# Altium PCB PCB_Thu.PcbDoc (part 2 of 2)
Units mm, origin at the board's own origin, x right, y up, seen from the top; angles counter-clockwise.
Board outline 107.94 x 47.36 mm, 2 copper layers (Top Layer, Bottom Layer); 234 components, 35 nets, 885 pads, 0 vias.
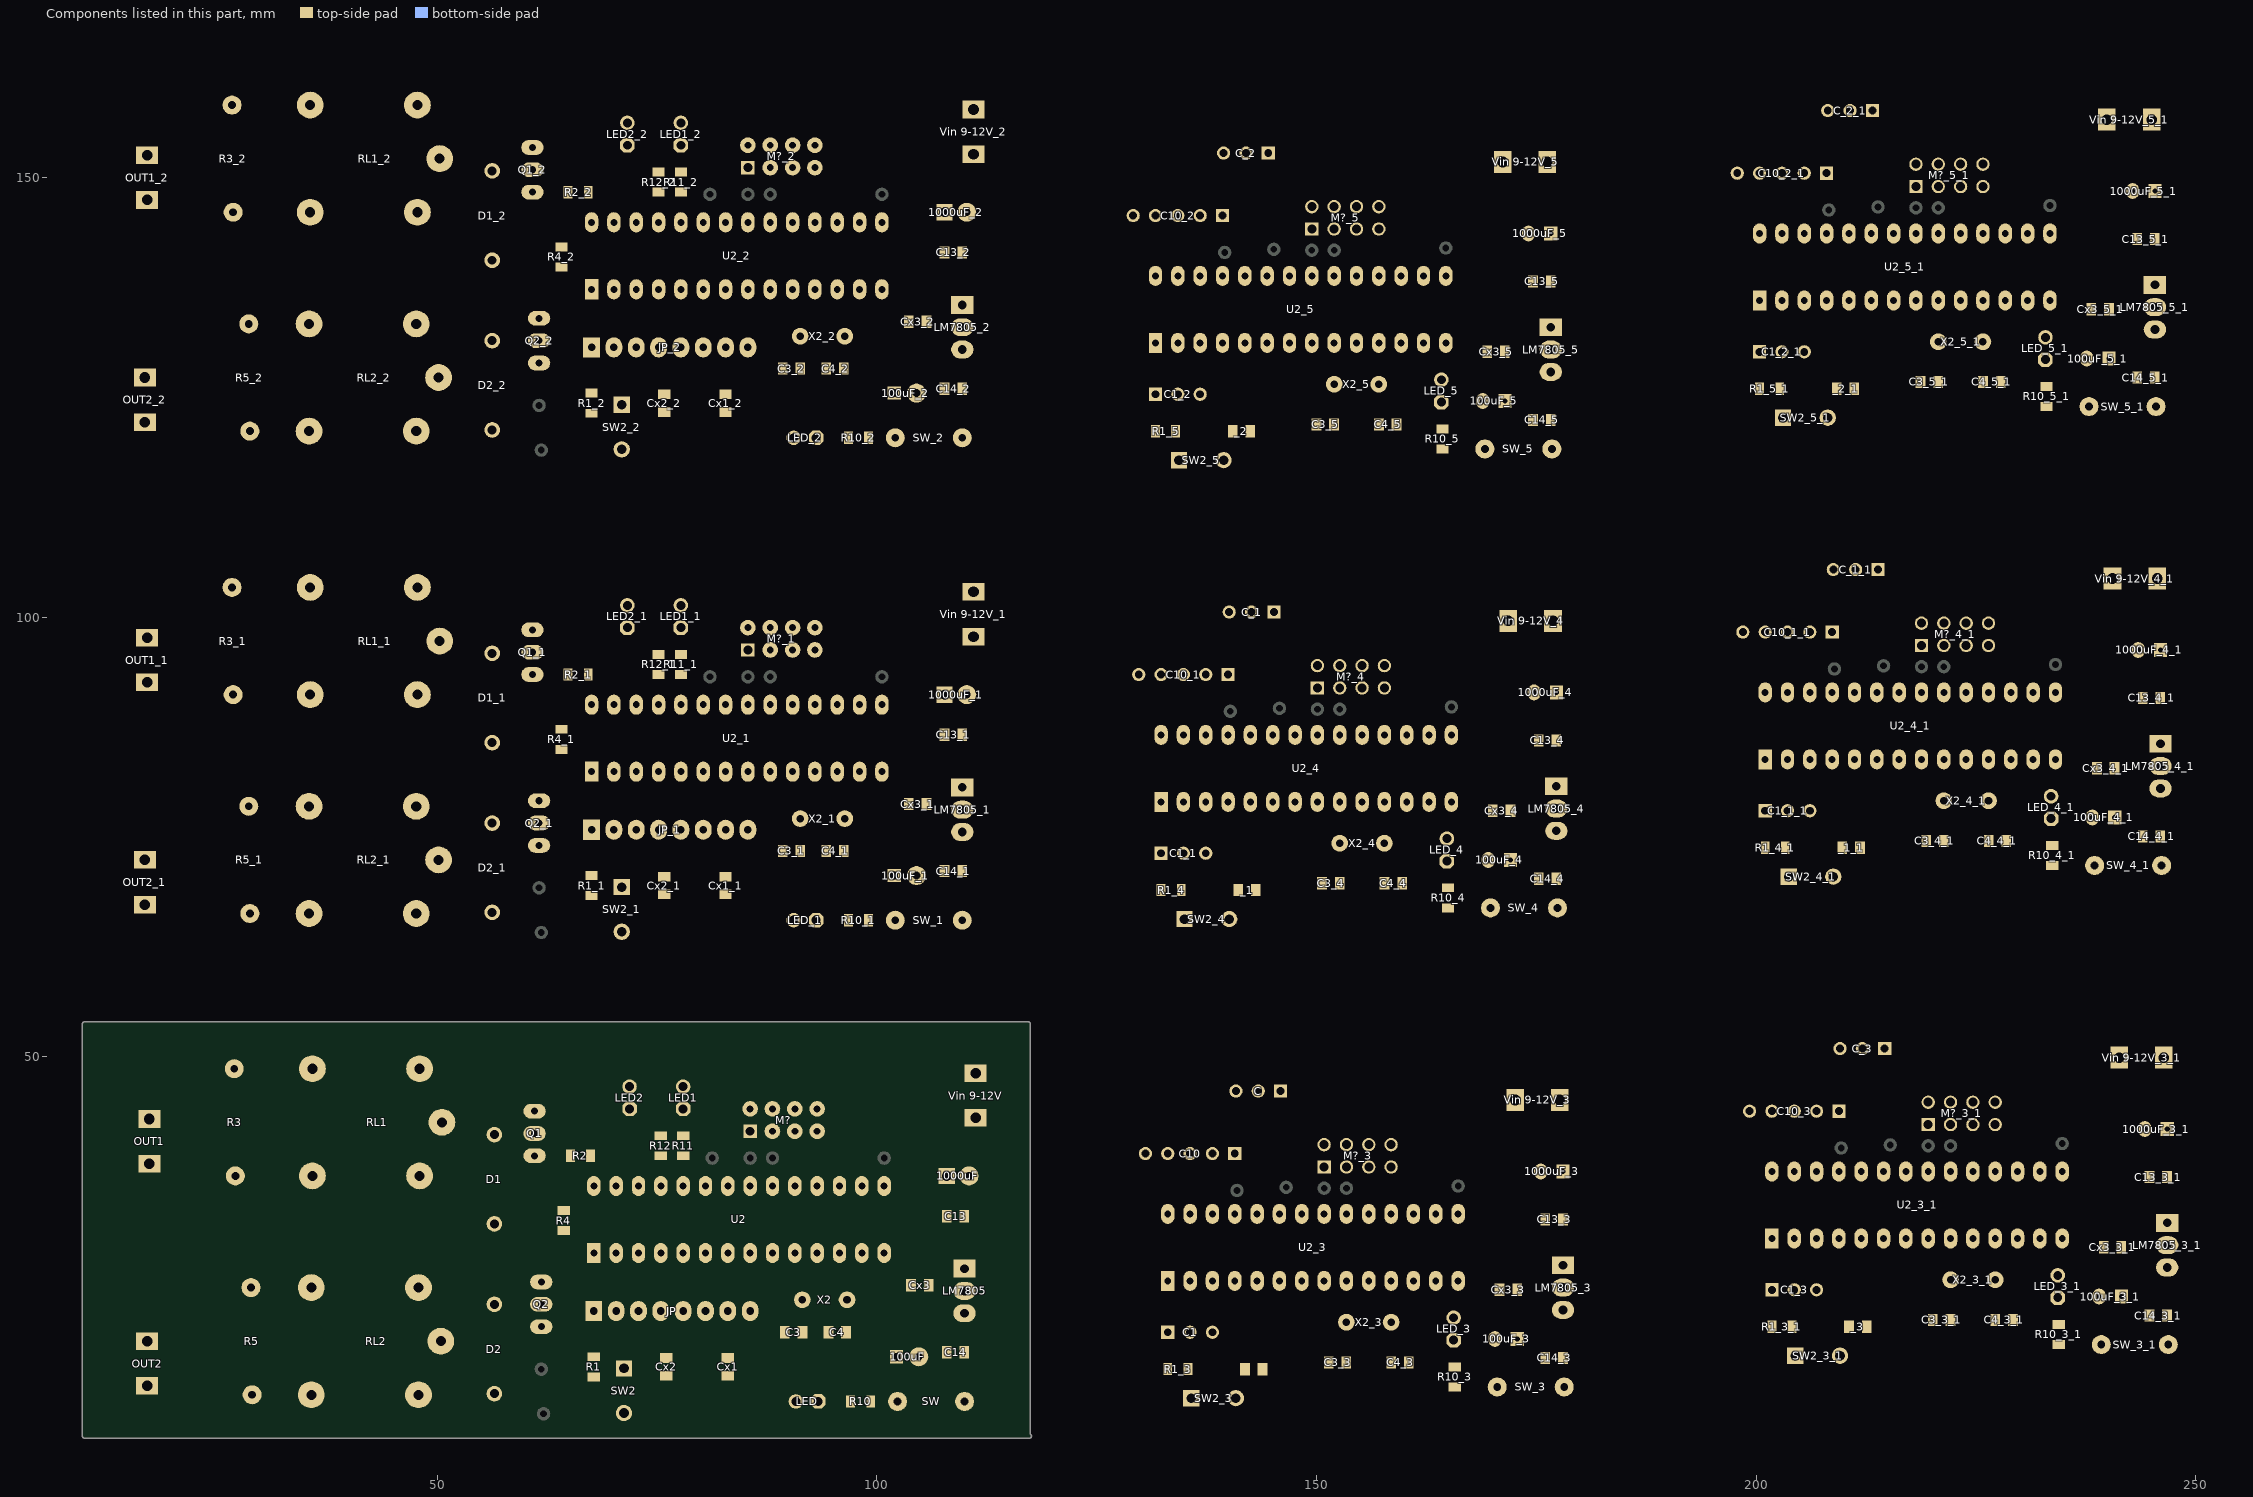
[diagram p2: the components of this part, seen from the top]

## Nets (pads, with @x,y where several pads share a name; then routed paths per layer and width w, separated by ;. In a path a pad name is that pad's centre, name@x,y a point inside that pad or via, vN(x,y) a via of type N, cw(c..) or ccw(c..) an arc to the next point about the centre after c; other vN are vias at no path point) (continued)
pads on no net: 100uF_1.1 100uF_1.2 100uF_2.1 100uF_2.2 100uF_3.1 100uF_3.2 100uF_3_1.1 100uF_3_1.2 100uF_4.1 100uF_4.2 100uF_4_1.1 100uF_4_1.2 100uF_5.1 100uF_5.2 100uF_5_1.1 100uF_5_1.2 1000uF_1.1 1000uF_1.2 1000uF_2.1 1000uF_2.2 1000uF_3.1 1000uF_3.2 1000uF_3_1.1 1000uF_3_1.2 1000uF_4.1 1000uF_4.2 1000uF_4_1.1 1000uF_4_1.2 1000uF_5.1 1000uF_5.2 1000uF_5_1.1 1000uF_5_1.2 "Vin 9-12V_1.1" "Vin 9-12V_1.2" "Vin 9-12V_2.1" "Vin 9-12V_2.2" "Vin 9-12V_3.1" "Vin 9-12V_3.2" "Vin 9-12V_3_1.1" "Vin 9-12V_3_1.2" "Vin 9-12V_4.1" "Vin 9-12V_4.2" "Vin 9-12V_4_1.1" "Vin 9-12V_4_1.2" "Vin 9-12V_5.1" "Vin 9-12V_5.2" "Vin 9-12V_5_1.1" "Vin 9-12V_5_1.2" ?.1 ?.2 _1.1 _1.2 _1_1.1 _1_1.2 _2.1 _2.2 _2_1.1 _2_1.2 _3.1 _3.2 C1.1 C1.2 C1.3 C1_1.1 C1_1.2 C1_1.3 C1_1_1.1 C1_1_1.2 C1_1_1.3 C1_2.1 C1_2.2 C1_2.3 C1_2_1.1 C1_2_1.2 C1_2_1.3 C1_3.1 C1_3.2 C1_3.3 C3_1.1 C3_1.2 C3_2.1 C3_2.2 C3_3.1 C3_3.2 C3_3_1.1 C3_3_1.2 C3_4.1 C3_4.2 C3_4_1.1 C3_4_1.2 C3_5.1 C3_5.2 C3_5_1.1 C3_5_1.2 C4_1.1 C4_1.2 C4_2.1 C4_2.2 C4_3.1 C4_3.2 C4_3_1.1 C4_3_1.2 C4_4.1 C4_4.2 C4_4_1.1 C4_4_1.2 C4_5.1 C4_5.2 C4_5_1.1 C4_5_1.2 C10.1 C10.2 C10.3 C10.4 C10.5 C10_1.1 C10_1.2 C10_1.3 C10_1.4 C10_1.5 C10_1_1.1 C10_1_1.2 C10_1_1.3 C10_1_1.4 C10_1_1.5 C10_2.1 C10_2.2 C10_2.3 C10_2.4 C10_2.5 C10_2_1.1 C10_2_1.2 C10_2_1.3 C10_2_1.4 C10_2_1.5 C10_3.1 C10_3.2 C10_3.3 C10_3.4 C10_3.5 C13_1.1 C13_1.2 C13_2.1 C13_2.2 C13_3.1 C13_3.2 C13_3_1.1 C13_3_1.2 C13_4.1 C13_4.2 C13_4_1.1 C13_4_1.2 C13_5.1 C13_5.2 C13_5_1.1 C13_5_1.2 C14_1.1 C14_1.2 C14_2.1 C14_2.2 C14_3.1 C14_3.2 C14_3_1.1 C14_3_1.2 C14_4.1 C14_4.2 C14_4_1.1 C14_4_1.2 C14_5.1 C14_5.2 C14_5_1.1 C14_5_1.2 C.1 C.2 C.3 C_1.1 C_1.2 C_1.3 C_1_1.1 C_1_1.2 C_1_1.3 C_2.1 C_2.2 C_2.3 C_2_1.1 C_2_1.2 C_2_1.3 C_3.1 C_3.2 C_3.3 Cx1_1.1 Cx1_1.2 Cx1_2.1 Cx1_2.2 Cx2_1.1 Cx2_1.2 Cx2_2.1 Cx2_2.2 Cx3_1.1 Cx3_1.2 Cx3_2.1 Cx3_2.2 Cx3_3.1 Cx3_3.2 Cx3_3_1.1 Cx3_3_1.2 Cx3_4.1 Cx3_4.2 Cx3_4_1.1 Cx3_4_1.2 Cx3_5.1 Cx3_5.2 Cx3_5_1.1 Cx3_5_1.2 D1_1.1 D1_1.2 D1_2.1 D1_2.2 D2_1.1 D2_1.2 D2_2.1 D2_2.2 JP_1.1 JP_1.2 JP_1.3 JP_1.4 JP_1.5 JP_1.6 JP_1.7 JP_1.8 JP_2.1 JP_2.2 JP_2.3 JP_2.4 JP_2.5 JP_2.6 JP_2.7 JP_2.8 LED1_1.1 LED1_1.2 LED1_2.1 LED1_2.2 LED2_1.1 LED2_1.2 LED2_2.1 LED2_2.2 LED_1.1 LED_1.2 LED_2.1 LED_2.2 LED_3.1 LED_3.2 LED_3_1.1 LED_3_1.2 LED_4.1 LED_4.2 LED_4_1.1 LED_4_1.2 LED_5.1 LED_5.2 LED_5_1.1 LED_5_1.2 LM7805_1.1 LM7805_1.2 LM7805_1.3 LM7805_2.1 LM7805_2.2 LM7805_2.3 LM7805_3.1 LM7805_3.2 LM7805_3.3 LM7805_3_1.1 LM7805_3_1.2 LM7805_3_1.3 LM7805_4.1 LM7805_4.2 LM7805_4.3 LM7805_4_1.1 LM7805_4_1.2 LM7805_4_1.3 LM7805_5.1 LM7805_5.2 LM7805_5.3 LM7805_5_1.1 LM7805_5_1.2 LM7805_5_1.3 M?_1.1 M?_1.2 M?_1.3 M?_1.4 M?_1.5 M?_1.6 M?_1.7 M?_1.8 M?_2.1 M?_2.2 M?_2.3 M?_2.4 M?_2.5 M?_2.6 M?_2.7 M?_2.8 M?_3.1 M?_3.2 M?_3.3 M?_3.4 M?_3.5 M?_3.6 M?_3.7 M?_3.8 M?_3_1.1 M?_3_1.2 M?_3_1.3 M?_3_1.4 M?_3_1.5 M?_3_1.6 M?_3_1.7 M?_3_1.8 M?_4.1 M?_4.2 M?_4.3 M?_4.4 M?_4.5 M?_4.6 M?_4.7 M?_4.8 M?_4_1.1 M?_4_1.2 M?_4_1.3 M?_4_1.4 M?_4_1.5 M?_4_1.6 M?_4_1.7 M?_4_1.8 M?_5.1 M?_5.2 M?_5.3 M?_5.4 M?_5.5 M?_5.6 M?_5.7 M?_5.8 M?_5_1.1 M?_5_1.2 M?_5_1.3 M?_5_1.4 M?_5_1.5 M?_5_1.6 M?_5_1.7 M?_5_1.8 OUT1_1.1 OUT1_1.2 OUT1_2.1 OUT1_2.2 OUT2_1.1 OUT2_1.2 OUT2_2.1 OUT2_2.2 Q1_1.1 Q1_1.2 Q1_1.3 Q1_2.1 Q1_2.2 Q1_2.3 Q2_1.1 Q2_1.2 Q2_1.3 Q2_2.1 Q2_2.2 Q2_2.3 R1_1.1 R1_1.2 R1_2.1 R1_2.2 R1_3.1 R1_3.2 R1_3_1.1 R1_3_1.2 R1_4.1 R1_4.2 R1_4_1.1 R1_4_1.2 R1_5.1 R1_5.2 R1_5_1.1 R1_5_1.2 R2_1.1 R2_1.2 R2_2.1 R2_2.2 R3_1.1 R3_1.2 R3_2.1 R3_2.2 R4_1.1 R4_1.2 R4_2.1 R4_2.2 R5_1.1 R5_1.2 R5_2.1 R5_2.2 R10_1.1 R10_1.2 R10_2.1 R10_2.2 R10_3.1 R10_3.2 R10_3_1.1 R10_3_1.2 R10_4.1 R10_4.2 R10_4_1.1 R10_4_1.2 R10_5.1 R10_5.2 R10_5_1.1 R10_5_1.2 R11_1.1 R11_1.2 R11_2.1 R11_2.2 R12_1.1 R12_1.2 R12_2.1 R12_2.2 RL1.2 RL1_1.1 RL1_1.2 RL1_1.3 RL1_1.4 RL1_1.5 RL1_2.1 RL1_2.2 RL1_2.3 RL1_2.4 RL1_2.5 RL2.2 RL2_1.1 RL2_1.2 RL2_1.3 RL2_1.4 RL2_1.5 RL2_2.1 RL2_2.2 RL2_2.3 RL2_2.4 RL2_2.5 SW2_1.1 SW2_1.2 SW2_2.1 SW2_2.2 SW2_3.1 SW2_3.2 SW2_3_1.1 SW2_3_1.2 SW2_4.1 SW2_4.2 SW2_4_1.1 SW2_4_1.2 SW2_5.1 SW2_5.2 SW2_5_1.1 SW2_5_1.2 SW_1.1 SW_1.2 SW_2.1 SW_2.2 SW_3.1 SW_3.2 SW_3_1.1 SW_3_1.2 SW_4.1 SW_4.2 SW_4_1.1 SW_4_1.2 SW_5.1 SW_5.2 SW_5_1.1 SW_5_1.2 U2.11 U2.12 U2.13 U2.14 U2.23 U2.26 U2_1.1 U2_1.2 U2_1.3 U2_1.4 U2_1.5 U2_1.6 U2_1.7 U2_1.8 U2_1.9 U2_1.10 U2_1.11 U2_1.12 U2_1.13 U2_1.14 U2_1.15 U2_1.16 U2_1.17 U2_1.18 U2_1.19 U2_1.20 U2_1.21 U2_1.22 U2_1.23 U2_1.24 U2_1.25 U2_1.26 U2_1.27 U2_1.28 U2_2.1 U2_2.2 U2_2.3 U2_2.4 U2_2.5 U2_2.6 U2_2.7 U2_2.8 U2_2.9 U2_2.10 U2_2.11 U2_2.12 U2_2.13 U2_2.14 U2_2.15 U2_2.16 U2_2.17 U2_2.18 U2_2.19 U2_2.20 U2_2.21 U2_2.22 U2_2.23 U2_2.24 U2_2.25 U2_2.26 U2_2.27 U2_2.28 U2_3.1 U2_3.2 U2_3.3 U2_3.4 U2_3.5 U2_3.6 U2_3.7 U2_3.8 U2_3.9 U2_3.10 U2_3.11 U2_3.12 U2_3.13 U2_3.14 U2_3.15 U2_3.16 U2_3.17 U2_3.18 U2_3.19 U2_3.20 U2_3.21 U2_3.22 U2_3.23 U2_3.24 U2_3.25 U2_3.26 U2_3.27 U2_3.28 U2_3_1.1 U2_3_1.2 U2_3_1.3 U2_3_1.4 U2_3_1.5 U2_3_1.6 U2_3_1.7 U2_3_1.8 U2_3_1.9 U2_3_1.10 U2_3_1.11 U2_3_1.12 U2_3_1.13 U2_3_1.14 U2_3_1.15 U2_3_1.16 U2_3_1.17 U2_3_1.18 U2_3_1.19 U2_3_1.20 U2_3_1.21 U2_3_1.22 U2_3_1.23 U2_3_1.24 U2_3_1.25 U2_3_1.26 U2_3_1.27 U2_3_1.28 U2_4.1 U2_4.2 U2_4.3 U2_4.4 U2_4.5 U2_4.6 U2_4.7 U2_4.8 U2_4.9 U2_4.10 U2_4.11 U2_4.12 U2_4.13 U2_4.14 U2_4.15 U2_4.16 U2_4.17 U2_4.18 U2_4.19 U2_4.20 U2_4.21 U2_4.22 U2_4.23 U2_4.24 U2_4.25 U2_4.26 U2_4.27 U2_4.28 U2_4_1.1 U2_4_1.2 U2_4_1.3 U2_4_1.4 U2_4_1.5 U2_4_1.6 U2_4_1.7 U2_4_1.8 U2_4_1.9 U2_4_1.10 U2_4_1.11 U2_4_1.12 U2_4_1.13 U2_4_1.14 U2_4_1.15 U2_4_1.16 U2_4_1.17 U2_4_1.18 U2_4_1.19 U2_4_1.20 U2_4_1.21 U2_4_1.22 U2_4_1.23 U2_4_1.24 U2_4_1.25 U2_4_1.26 U2_4_1.27 U2_4_1.28 U2_5.1 U2_5.2 U2_5.3 U2_5.4 U2_5.5 U2_5.6 U2_5.7 U2_5.8 U2_5.9 U2_5.10 U2_5.11 U2_5.12 U2_5.13 U2_5.14 U2_5.15 U2_5.16 U2_5.17 U2_5.18 U2_5.19 U2_5.20 U2_5.21 U2_5.22 U2_5.23 U2_5.24 U2_5.25 U2_5.26 U2_5.27 U2_5.28 U2_5_1.1 U2_5_1.2 U2_5_1.3 U2_5_1.4 U2_5_1.5 U2_5_1.6 U2_5_1.7 U2_5_1.8 U2_5_1.9 U2_5_1.10 U2_5_1.11 U2_5_1.12 U2_5_1.13 U2_5_1.14 U2_5_1.15 U2_5_1.16 U2_5_1.17 U2_5_1.18 U2_5_1.19 U2_5_1.20 U2_5_1.21 U2_5_1.22 U2_5_1.23 U2_5_1.24 U2_5_1.25 U2_5_1.26 U2_5_1.27 U2_5_1.28 X2_1.1 X2_1.2 X2_2.1 X2_2.2 X2_3.1 X2_3.2 X2_3_1.1 X2_3_1.2 X2_4.1 X2_4.2 X2_4_1.1 X2_4_1.2 X2_5.1 X2_5.2 X2_5_1.1 X2_5_1.2
copper on no net: | length 5806.6
  Top Layer w0.5: 16.637,92.964 17.018,92.583 ; 16.637,147.828 17.018,147.447 ; 60.833,98.552 68.834,98.552 71.628,101.346 77.724,101.346 81.026,98.044 81.026,93.218 81.026,91.821 82.804,90.043 ; 60.833,153.416 68.834,153.416 71.628,156.21 77.724,156.21 81.026,152.908 81.026,148.082 81.026,146.685 82.804,144.907 ; 61.595,69.215 61.595,74.041 ; 61.595,124.079 61.595,128.905 ; 61.849,64.135 70.912,64.135 ; 61.849,118.999 70.912,118.999 ; 85.344,75.819 85.344,82.423 ; 85.344,93.218 85.344,96.266 ; 85.344,130.683 85.344,137.287 ; 85.344,148.082 85.344,151.13 ; 90.424,98.806 90.424,99.06 91.809,100.445 94.373,100.445 95.504,99.314 95.504,90.043 ; 90.424,153.67 90.424,153.924 91.809,155.309 94.373,155.309 95.504,154.178 95.504,144.907 ; 107.696,70.231 107.708,70.243 107.708,77.331 108.954,77.331 109.728,78.105 112.776,78.105 114.427,79.756 114.427,83.185 111.506,86.106 111.506,89.916 110.236,91.186 112.998,93.948 112.998,99.101 110.998,101.101 110.998,102.87 111.379,103.251 ; 107.696,125.095 107.708,125.107 107.708,132.195 108.954,132.195 109.728,132.969 112.776,132.969 114.427,134.62 114.427,138.049 111.506,140.97 111.506,144.78 110.236,146.05 112.998,148.812 112.998,153.965 110.998,155.965 110.998,157.734 111.379,158.115 ; 116.967,61.595 116.967,108.458 9.652,108.458 9.652,61.595 117.094,61.595 ; 116.967,61.976 116.967,108.204 ; 116.967,116.459 116.967,163.322 9.652,163.322 9.652,116.459 117.094,116.459 ; 116.967,116.84 116.967,163.068 ; 117.221,6.858 117.221,53.721 9.906,53.721 9.906,6.858 117.348,6.858 ; 117.221,7.239 117.221,53.467 ; 125.857,115.57 125.857,157.353 181.483,157.353 181.483,115.57 125.857,115.57 ; 126.492,63.373 126.492,105.156 182.118,105.156 182.118,63.373 126.492,63.373 ; 127.254,8.89 127.254,50.673 182.88,50.673 182.88,8.89 127.254,8.89 ; 194.564,120.396 250.19,120.396 250.19,162.179 194.564,162.179 194.564,120.396 ; 195.199,68.199 250.825,68.199 250.825,109.982 195.199,109.982 195.199,68.199 ; 195.961,13.716 251.587,13.716 251.587,55.499 195.961,55.499 195.961,13.716
  Top Layer w0.6: 28.321,66.294 28.702,66.294 ; 28.321,121.158 28.702,121.158 ; 47.498,66.294 47.625,66.294 56.134,66.294 ; 47.498,121.158 47.625,121.158 56.134,121.158 ; 47.625,78.486 49.53,76.581 56.261,76.581 62.103,76.581 62.357,76.327 ; 47.625,133.35 49.53,131.445 56.261,131.445 62.103,131.445 62.357,131.191 ; 47.752,103.378 48.768,103.378 56.261,95.885 ; 47.752,158.242 48.768,158.242 56.261,150.749 ; 56.261,85.725 53.213,85.725 47.752,91.186 44.069,87.503 44.069,77.089 46.228,74.93 53.086,74.93 56.261,71.755 56.261,66.421 67.564,66.421 ; 56.261,140.589 53.213,140.589 47.752,146.05 44.069,142.367 44.069,131.953 46.228,129.794 53.086,129.794 56.261,126.619 56.261,121.285 67.564,121.285 ; 56.388,96.012 60.833,96.012 ; 56.388,150.876 60.833,150.876 ; 60.325,93.472 64.897,93.472 ; 60.325,148.336 64.897,148.336 ; 61.595,79.121 61.595,80.518 ; 61.595,133.985 61.595,135.382 ; 61.722,80.645 64.135,83.058 64.135,84.963 ; 61.722,135.509 64.135,137.922 64.135,139.827 ; 64.135,87.249 66.929,90.043 67.564,90.043 ; 64.135,142.113 66.929,144.907 67.564,144.907 ; 67.183,93.472 70.104,90.551 70.104,90.043 ; 67.183,148.336 70.104,145.415 70.104,144.907 ; 67.564,68.326 67.564,66.421 ; 67.564,82.423 67.564,75.819 67.564,70.612 67.608,70.612 68.923,69.296 70.993,69.296 ; 67.564,123.19 67.564,121.285 ; 67.564,137.287 67.564,130.683 67.564,125.476 67.608,125.476 68.923,124.16 70.993,124.16 ; 70.104,75.819 70.104,82.423 ; 70.104,130.683 70.104,137.287 ; 71.628,98.806 74.676,95.758 75.184,95.758 ; 71.628,153.67 74.676,150.622 75.184,150.622 ; 72.644,75.819 72.644,82.423 ; 72.644,130.683 72.644,137.287 ; 75.184,75.819 75.184,82.423 ; 75.184,90.043 75.184,93.472 ; 75.184,130.683 75.184,137.287 ; 75.184,144.907 75.184,148.336 ; 77.724,75.819 77.724,82.423 ; 77.724,90.043 77.724,93.472 ; 77.724,95.758 77.724,98.806 ; 77.724,130.683 77.724,137.287 ; 77.724,144.907 77.724,148.336 ; 77.724,150.622 77.724,153.67 ; 80.264,75.819 80.264,82.423 ; 80.264,130.683 80.264,137.287 ; 82.804,70.469 75.819,70.469 75.147,70.469 71.099,66.421 67.564,66.421 ; 82.804,82.423 82.804,75.819 82.804,70.469 101.838,70.469 ; 82.804,82.473 86.945,86.614 ; 82.804,125.333 75.819,125.333 75.147,125.333 71.099,121.285 67.564,121.285 ; 82.804,137.287 82.804,130.683 82.804,125.333 101.838,125.333 ; 82.804,137.337 86.945,141.478 ; 85.344,98.806 85.233,98.806 83.439,97.012 83.439,92.456 85.344,90.551 85.344,90.043 85.344,87.739 86.469,86.614 86.945,86.614 ; 85.344,153.67 85.233,153.67 83.439,151.876 83.439,147.32 85.344,145.415 85.344,144.907 85.344,142.603 86.469,141.478 86.945,141.478 ; 87.884,82.423 87.884,80.49 91.285,77.089 91.285,73.418 ; 87.884,90.043 87.884,87.553 86.945,86.614 ; 87.884,93.218 87.884,96.266 ; 87.884,98.806 87.884,99.695 90.805,102.616 95.631,102.616 98.044,100.203 98.044,90.043 97.79,90.297 ; 87.884,137.287 87.884,135.354 91.285,131.953 91.285,128.282 ; 87.884,144.907 87.884,142.417 86.945,141.478 ; 87.884,148.082 87.884,151.13 ; 87.884,153.67 87.884,154.559 90.805,157.48 95.631,157.48 98.044,155.067 98.044,144.907 97.79,145.161 ; 90.424,82.423 90.424,82.373 95.708,77.089 ; 90.424,90.043 90.424,96.266 ; 90.424,137.287 90.424,137.237 95.708,131.953 ; 90.424,144.907 90.424,151.13 ; 92.964,90.043 92.964,96.266 ; 92.964,144.907 92.964,151.13 ; 93.091,65.532 96.774,65.532 ; 93.091,120.396 96.774,120.396 ; 96.365,73.521 96.365,77.089 ; 96.365,128.385 96.365,131.953 ; 99.06,65.532 102.108,65.532 102.108,70.469 ; 99.06,120.396 102.108,120.396 102.108,125.333 ; 100.584,90.043 100.584,93.218 ; 100.584,144.907 100.584,148.082 ; 102.108,70.612 102.108,77.2 103.648,78.74 ; 102.108,125.476 102.108,132.064 103.648,133.604 ; 109.728,65.532 109.728,75.565 ; 109.728,80.645 109.728,83.693 107.696,85.725 107.696,86.106 107.696,91.186 107.696,93.218 110.998,96.52 110.998,97.79 ; 109.728,120.396 109.728,130.429 ; 109.728,135.509 109.728,138.557 107.696,140.589 107.696,140.97 107.696,146.05 107.696,148.082 110.998,151.384 110.998,152.654 ; 129.159,145.669 129.159,137.922 133.096,133.985 146.812,133.985 146.939,134.112 ; 129.794,93.472 129.794,85.725 133.731,81.788 147.447,81.788 147.574,81.915 ; 130.556,38.989 130.556,31.242 134.493,27.305 148.209,27.305 148.336,27.432 ; 131.699,131.191 131.699,125.349 131.699,121.158 131.699,120.523 134.366,117.856 ; 131.699,138.811 131.699,145.669 ; 132.334,78.994 132.334,73.152 132.334,68.961 132.334,68.326 135.001,65.659 ; 132.334,86.614 132.334,93.472 ; 133.096,24.511 133.096,18.669 133.096,14.478 133.096,13.843 135.763,11.176 ; 133.096,32.131 133.096,38.989 ; 133.985,121.158 140.478,121.158 ; 134.239,125.349 134.239,131.191 ; 134.239,138.811 134.239,145.669 ; 134.62,68.961 141.113,68.961 ; 134.874,73.152 134.874,78.994 ; 134.874,86.614 134.874,93.472 ; 135.382,14.478 141.875,14.478 ; 135.636,18.669 135.636,24.511 ; 135.636,32.131 135.636,38.989 ; 136.779,125.349 136.779,131.191 ; 137.414,73.152 137.414,78.994 ; 138.176,18.669 138.176,24.511 ; 139.446,117.856 140.589,117.856 142.478,119.745 142.478,121.158 143.24,121.92 147.193,121.92 ; 139.446,152.781 139.446,145.796 139.319,145.669 139.319,144.145 139.573,141.478 ; 140.081,65.659 141.224,65.659 143.113,67.548 143.113,68.961 143.875,69.723 147.828,69.723 ; 140.081,100.584 140.081,93.599 139.954,93.472 139.954,91.948 140.208,89.281 ; 140.478,121.158 140.478,124.095 146.939,130.556 146.939,131.191 146.939,134.112 ; 140.843,11.176 141.986,11.176 143.875,13.065 143.875,14.478 144.637,15.24 148.59,15.24 ; 140.843,46.101 140.843,39.116 140.716,38.989 140.716,37.465 140.97,34.798 ; 141.113,68.961 141.113,71.898 147.574,78.359 147.574,78.994 147.574,81.915 ; 141.875,14.478 141.875,17.415 148.336,23.876 148.336,24.511 148.336,27.432 ; 141.986,152.781 141.986,141.986 144.399,139.573 144.399,138.811 ; 142.621,100.584 142.621,89.789 145.034,87.376 145.034,86.614 ; 143.383,46.101 143.383,35.306 145.796,32.893 145.796,32.131 ; 144.526,152.781 149.479,147.828 149.479,146.685 148.082,146.685 147.193,145.796 147.193,141.478 149.479,139.192 149.479,138.811 ; 145.161,100.584 150.114,95.631 150.114,94.488 148.717,94.488 147.828,93.599 147.828,89.281 150.114,86.995 150.114,86.614 ; 145.161,141.827 146.939,139.827 146.939,138.811 ; 145.796,89.63 147.574,87.63 147.574,86.614 ; 145.923,46.101 150.876,41.148 150.876,40.005 149.479,40.005 148.59,39.116 148.59,34.798 150.876,32.512 150.876,32.131 ; 146.558,35.147 148.336,33.147 148.336,32.131 ; 149.479,131.191 149.479,124.206 147.193,121.92 ; 149.479,141.732 149.479,144.145 ; 150.003,121.92 147.193,121.92 ; 150.114,78.994 150.114,72.009 147.828,69.723 ; 150.114,89.535 150.114,91.948 ; 150.638,69.723 147.828,69.723 ; 150.876,24.511 150.876,17.526 148.59,15.24 ; 150.876,35.052 150.876,37.465 ; 151.4,15.24 148.59,15.24 ; 152.003,121.92 152.019,121.936 152.019,126.492 152.019,131.191 ; 152.019,138.811 149.479,138.811 ; 152.019,141.732 152.019,144.145 ; 152.019,146.685 152.019,146.812 155.448,150.241 158.75,150.241 162.179,146.812 162.179,139.192 ; 152.638,69.723 152.654,69.739 152.654,74.295 152.654,78.994 ; 152.654,86.614 150.114,86.614 ; 152.654,89.535 152.654,91.948 ; 152.654,94.488 152.654,94.615 156.083,98.044 159.385,98.044 162.814,94.615 162.814,86.995 ; 153.4,15.24 153.416,15.256 153.416,19.812 153.416,24.511 ; 153.416,32.131 150.876,32.131 ; 153.416,35.052 153.416,37.465 ; 153.416,40.005 153.416,40.132 156.845,43.561 160.147,43.561 163.576,40.132 163.576,32.512 ; 154.559,131.191 154.559,129.032 157.099,126.492 157.099,121.936 157.115,121.92 ; 154.559,138.811 154.559,143.637 ; 154.559,146.685 156.21,148.336 157.988,148.336 159.639,146.685 159.639,138.811 ; 155.194,78.994 155.194,76.835 157.734,74.295 157.734,69.739 157.75,69.723 ; 155.194,86.614 155.194,91.44 ; 155.194,94.488 156.845,96.139 158.623,96.139 160.274,94.488 160.274,86.614 ; 155.956,24.511 155.956,22.352 158.496,19.812 158.496,15.256 158.512,15.24 ; 155.956,32.131 155.956,36.957 ; 155.956,40.005 157.607,41.656 159.385,41.656 161.036,40.005 161.036,32.131 ; 157.099,138.811 157.099,143.637 ; 157.734,86.614 157.734,91.44 ; 158.496,32.131 158.496,36.957 ; 159.115,121.92 164.195,127 164.211,127 166.497,127 168.91,124.587 168.91,129.651 169.434,130.175 ; 159.75,69.723 164.83,74.803 164.846,74.803 167.132,74.803 169.545,72.39 169.545,77.454 170.069,77.978 ; 160.512,15.24 165.592,20.32 165.608,20.32 167.894,20.32 170.307,17.907 170.307,22.971 170.831,23.495 ; 164.211,124.46 164.211,121.539 164.338,121.412 ; 164.338,119.126 169.164,119.126 171.45,121.412 171.45,124.587 171.434,124.603 171.434,130.175 171.434,131.842 168.402,134.874 151.257,134.874 149.479,136.652 ; 164.719,138.811 164.719,141.478 ; 164.846,72.263 164.846,69.342 164.973,69.215 ; 164.973,66.929 169.799,66.929 172.085,69.215 172.085,72.39 172.069,72.406 172.069,77.978 172.069,79.645 169.037,82.677 151.892,82.677 150.114,84.455 ; 165.354,86.614 165.354,89.281 ; 165.608,17.78 165.608,14.859 165.735,14.732 ; 165.735,12.446 170.561,12.446 172.847,14.732 172.847,17.907 172.831,17.923 172.831,23.495 172.831,25.162 169.799,28.194 152.654,28.194 150.876,29.972 ; 166.116,32.131 166.116,34.798 ; 171.196,151.765 171.196,146.558 174.117,143.637 174.641,143.113 174.641,138.176 172.847,136.382 172.847,132.334 173.736,131.445 ; 171.831,99.568 171.831,94.361 174.752,91.44 175.276,90.916 175.276,85.979 173.482,84.185 173.482,80.137 174.371,79.248 ; 172.593,45.085 172.593,39.878 175.514,36.957 176.038,36.433 176.038,31.496 174.244,29.702 174.244,25.654 175.133,24.765 ; 174.641,122.428 173.736,123.333 173.736,131.445 ; 175.276,70.231 174.371,71.136 174.371,79.248 ; 176.038,15.748 175.133,16.653 175.133,24.765 ; 176.276,151.765 176.276,144.018 176.657,143.637 176.641,143.621 176.641,138.176 176.657,138.16 176.657,132.969 ; 176.657,127.889 176.657,122.444 176.641,122.428 176.784,122.285 176.784,118.999 ; 176.657,130.429 174.752,130.429 173.736,131.445 ; 176.911,99.568 176.911,91.821 177.292,91.44 177.276,91.424 177.276,85.979 177.292,85.963 177.292,80.772 ; 176.911,143.637 177.165,143.891 ; 177.292,75.692 177.292,70.247 177.276,70.231 177.419,70.088 177.419,66.802 ; 177.292,78.232 175.387,78.232 174.371,79.248 ; 177.546,91.44 177.8,91.694 ; 177.673,45.085 177.673,37.338 178.054,36.957 178.038,36.941 178.038,31.496 178.054,31.48 178.054,26.289 ; 178.054,21.209 178.054,15.764 178.038,15.748 178.181,15.605 178.181,12.319 ; 178.054,23.749 176.149,23.749 175.133,24.765 ; 178.308,36.957 178.562,37.211 ; 197.866,150.495 197.866,142.748 201.803,138.811 215.519,138.811 215.646,138.938 ; 198.501,98.298 198.501,90.551 202.438,86.614 216.154,86.614 216.281,86.741 ; 199.263,43.815 199.263,36.068 203.2,32.131 216.916,32.131 217.043,32.258 ; 200.406,136.017 200.406,130.175 200.406,125.984 200.406,125.349 203.073,122.682 ; 200.406,143.637 200.406,150.495 ; 201.041,83.82 201.041,77.978 201.041,73.787 201.041,73.152 203.708,70.485 ; 201.041,91.44 201.041,98.298 ; 201.803,29.337 201.803,23.495 201.803,19.304 201.803,18.669 204.47,16.002 ; 201.803,36.957 201.803,43.815 ; 202.692,125.984 209.185,125.984 ; 202.946,130.175 202.946,136.017 ; 202.946,143.637 202.946,150.495 ; 203.327,73.787 209.82,73.787 ; 203.581,77.978 203.581,83.82 ; 203.581,91.44 203.581,98.298 ; 204.089,19.304 210.582,19.304 ; 204.343,23.495 204.343,29.337 ; 204.343,36.957 204.343,43.815 ; 205.486,130.175 205.486,136.017 ; 206.121,77.978 206.121,83.82 ; 206.883,23.495 206.883,29.337 ; 208.153,122.682 209.296,122.682 211.185,124.571 211.185,125.984 211.947,126.746 215.9,126.746 ; 208.153,157.607 208.153,150.622 208.026,150.495 208.026,148.971 208.28,146.304 ; 208.788,70.485 209.931,70.485 211.82,72.374 211.82,73.787 212.582,74.549 216.535,74.549 ; 208.788,105.41 208.788,98.425 208.661,98.298 208.661,96.774 208.915,94.107 ; 209.185,125.984 209.185,128.921 215.646,135.382 215.646,136.017 215.646,138.938 ; 209.55,16.002 210.693,16.002 212.582,17.891 212.582,19.304 213.344,20.066 217.297,20.066 ; 209.55,50.927 209.55,43.942 209.423,43.815 209.423,42.291 209.677,39.624 ; 209.82,73.787 209.82,76.724 216.281,83.185 216.281,83.82 216.281,86.741 ; 210.582,19.304 210.582,22.241 217.043,28.702 217.043,29.337 217.043,32.258 ; 210.693,157.607 210.693,146.812 213.106,144.399 213.106,143.637 ; 211.328,105.41 211.328,94.615 213.741,92.202 213.741,91.44 ; 212.09,50.927 212.09,40.132 214.503,37.719 214.503,36.957 ; 213.233,157.607 218.186,152.654 218.186,151.511 216.789,151.511 215.9,150.622 215.9,146.304 218.186,144.018 218.186,143.637 ; 213.868,105.41 218.821,100.457 218.821,99.314 217.424,99.314 216.535,98.425 216.535,94.107 218.821,91.821 218.821,91.44 ; 213.868,146.653 215.646,144.653 215.646,143.637 ; 214.503,94.456 216.281,92.456 216.281,91.44 ; 214.63,50.927 219.583,45.974 219.583,44.831 218.186,44.831 217.297,43.942 217.297,39.624 219.583,37.338 219.583,36.957 ; 215.265,39.973 217.043,37.973 217.043,36.957 ; 218.186,136.017 218.186,129.032 215.9,126.746 ; 218.186,146.558 218.186,148.971 ; 218.71,126.746 215.9,126.746 ; 218.821,83.82 218.821,76.835 216.535,74.549 ; 218.821,94.361 218.821,96.774 ; 219.345,74.549 216.535,74.549 ; 219.583,29.337 219.583,22.352 217.297,20.066 ; 219.583,39.878 219.583,42.291 ; 220.107,20.066 217.297,20.066 ; 220.71,126.746 220.726,126.762 220.726,131.318 220.726,136.017 ; 220.726,143.637 218.186,143.637 ; 220.726,146.558 220.726,148.971 ; 220.726,151.511 220.726,151.638 224.155,155.067 227.457,155.067 230.886,151.638 230.886,144.018 ; 221.345,74.549 221.361,74.565 221.361,79.121 221.361,83.82 ; 221.361,91.44 218.821,91.44 ; 221.361,94.361 221.361,96.774 ; 221.361,99.314 221.361,99.441 224.79,102.87 228.092,102.87 231.521,99.441 231.521,91.821 ; 222.107,20.066 222.123,20.082 222.123,24.638 222.123,29.337 ; 222.123,36.957 219.583,36.957 ; 222.123,39.878 222.123,42.291 ; 222.123,44.831 222.123,44.958 225.552,48.387 228.854,48.387 232.283,44.958 232.283,37.338 ; 223.266,136.017 223.266,133.858 225.806,131.318 225.806,126.762 225.822,126.746 ; 223.266,143.637 223.266,148.463 ; 223.266,151.511 224.917,153.162 226.695,153.162 228.346,151.511 228.346,143.637 ; 223.901,83.82 223.901,81.661 226.441,79.121 226.441,74.565 226.457,74.549 ; 223.901,91.44 223.901,96.266 ; 223.901,99.314 225.552,100.965 227.33,100.965 228.981,99.314 228.981,91.44 ; 224.663,29.337 224.663,27.178 227.203,24.638 227.203,20.082 227.219,20.066 ; 224.663,36.957 224.663,41.783 ; 224.663,44.831 226.314,46.482 228.092,46.482 229.743,44.831 229.743,36.957 ; 225.806,143.637 225.806,148.463 ; 226.441,91.44 226.441,96.266 ; 227.203,36.957 227.203,41.783 ; 227.822,126.746 232.902,131.826 232.918,131.826 235.204,131.826 237.617,129.413 237.617,134.477 238.141,135.001 ; 228.457,74.549 233.537,79.629 233.553,79.629 235.839,79.629 238.252,77.216 238.252,82.28 238.776,82.804 ; 229.219,20.066 234.299,25.146 234.315,25.146 236.601,25.146 239.014,22.733 239.014,27.797 239.538,28.321 ; 232.918,129.286 232.918,126.365 233.045,126.238 ; 233.045,123.952 237.871,123.952 240.157,126.238 240.157,129.413 240.141,129.429 240.141,135.001 240.141,136.668 237.109,139.7 219.964,139.7 218.186,141.478 ; 233.426,143.637 233.426,146.304 ; 233.553,77.089 233.553,74.168 233.68,74.041 ; 233.68,71.755 238.506,71.755 240.792,74.041 240.792,77.216 240.776,77.232 240.776,82.804 240.776,84.471 237.744,87.503 220.599,87.503 218.821,89.281 ; 234.061,91.44 234.061,94.107 ; 234.315,22.606 234.315,19.685 234.442,19.558 ; 234.442,17.272 239.268,17.272 241.554,19.558 241.554,22.733 241.538,22.749 241.538,28.321 241.538,29.988 238.506,33.02 221.361,33.02 219.583,34.798 ; 234.823,36.957 234.823,39.624 ; 239.903,156.591 239.903,151.384 242.824,148.463 243.348,147.939 243.348,143.002 241.554,141.208 241.554,137.16 242.443,136.271 ; 240.538,104.394 240.538,99.187 243.459,96.266 243.983,95.742 243.983,90.805 242.189,89.011 242.189,84.963 243.078,84.074 ; 241.3,49.911 241.3,44.704 244.221,41.783 244.745,41.259 244.745,36.322 242.951,34.528 242.951,30.48 243.84,29.591 ; 243.348,127.254 242.443,128.159 242.443,136.271 ; 243.983,75.057 243.078,75.962 243.078,84.074 ; 244.745,20.574 243.84,21.479 243.84,29.591 ; 244.983,156.591 244.983,148.844 245.364,148.463 245.348,148.447 245.348,143.002 245.364,142.986 245.364,137.795 ; 245.364,132.715 245.364,127.27 245.348,127.254 245.491,127.111 245.491,123.825 ; 245.364,135.255 243.459,135.255 242.443,136.271 ; 245.618,104.394 245.618,96.647 245.999,96.266 245.983,96.25 245.983,90.805 245.999,90.789 245.999,85.598 ; 245.618,148.463 245.872,148.717 ; 245.999,80.518 245.999,75.073 245.983,75.057 246.126,74.914 246.126,71.628 ; 245.999,83.058 244.094,83.058 243.078,84.074 ; 246.253,96.266 246.507,96.52 ; 246.38,49.911 246.38,42.164 246.761,41.783 246.745,41.767 246.745,36.322 246.761,36.306 246.761,31.115 ; 246.761,26.035 246.761,20.59 246.745,20.574 246.888,20.431 246.888,17.145 ; 246.761,28.575 244.856,28.575 243.84,29.591 ; 247.015,41.783 247.269,42.037 ; 146.939,134.112 149.479,136.652 ; 147.574,81.915 150.114,84.455 ; 148.336,27.432 150.876,29.972 ; 149.479,136.652 149.479,138.811 ; 150.114,84.455 150.114,86.614 ; 150.876,29.972 150.876,32.131 ; 215.646,138.938 218.186,141.478 ; 216.281,86.741 218.821,89.281 ; 217.043,32.258 219.583,34.798 ; 218.186,141.478 218.186,143.637 ; 218.821,89.281 218.821,91.44 ; 219.583,34.798 219.583,36.957
  Top Layer w2: 16.383,72.263 50.8,72.263 ; 16.383,127.127 50.8,127.127 ; 16.51,67.437 27.432,67.437 28.829,66.04 ; 16.51,122.301 27.432,122.301 28.829,120.904 ; 16.637,97.536 49.53,97.536 ; 16.637,152.4 49.53,152.4 ; 17.018,92.583 25.4,92.583 26.797,91.186 ; 17.018,147.447 25.4,147.447 26.797,146.05 ; 26.67,103.378 35.56,103.378 ; 26.67,158.242 35.56,158.242 ; 28.575,78.486 35.433,78.486 ; 28.575,133.35 35.433,133.35
  Bottom Layer w0.5: 61.595,64.389 61.595,69.215 ; 61.595,119.253 61.595,124.079 ; 81.026,93.218 85.344,93.218 ; 81.026,148.082 85.344,148.082
  Bottom Layer w0.6: 87.884,93.218 100.584,93.218 ; 87.884,148.082 100.584,148.082 ; 107.696,91.186 107.95,91.44 ; 107.696,146.05 107.95,146.304 ; 139.573,141.478 149.225,141.478 ; 140.208,89.281 149.86,89.281 ; 140.97,34.798 150.622,34.798 ; 152.019,141.732 164.465,141.732 ; 152.654,89.535 165.1,89.535 ; 153.416,35.052 165.862,35.052 ; 208.28,146.304 217.932,146.304 ; 208.915,94.107 218.567,94.107 ; 209.677,39.624 219.329,39.624 ; 220.726,146.558 233.172,146.558 ; 221.361,94.361 233.807,94.361 ; 222.123,39.878 234.569,39.878

## Polygon pours and split planes (outlines as drawn)
GND on Top Layer "Top Layer-No Net" (solid, pour order 14): 117.221,6.858 117.221,53.467 117.221,53.086
no net on Top Layer "Top Layer-No Net" (solid, pour order 20): 116.967,61.595 116.967,108.204 116.967,107.823
no net on Top Layer "Top Layer-No Net" (solid, pour order 22): 116.967,116.459 116.967,163.068 116.967,162.687

## Other copper
Top Layer:
  drawing of 42 lines, arcs and shapes, not listed

## Silkscreen, mask and mechanical layers (free items; w line width, h text height)
Top Overlay:
  text "M?" at 217.703,157.963 h1.52
  text "1000uF" at 245.008,157.201 h1.52
  text "Domino 2" at 243.726,155.334 h1.52
  text "M?" at 148.996,153.137 h1.52
  text "1000uF" at 176.301,152.375 h1.52
  text "Domino 2" at 175.019,150.508 h1.52
  text "C13" at 243.637,150.063 h1.52
  text "CN-ALU-DIP" at 246.139,149.517 h1.52
  text "NRF24L01" at 220.51,147.358 h1.52
  text "U2" at 199.288,145.745 h1.52
  text "C13" at 174.93,145.237 h1.52
  text "LM7805" at 247.523,144.983 h1.52
  text "CN-ALU-DIP" at 177.432,144.691 h1.52
  text "104" at 245.656,143.04 h1.52
  text "NRF24L01" at 151.803,142.532 h1.52
  text "U2" at 130.581,140.919 h1.52
  text "Cx3" at 235.407,140.233 h1.52
  text "LM7805" at 178.816,140.157 h1.52
  text "104" at 176.949,138.214 h1.52
  text "LM78xx" at 246.037,136.436 h1.52
  text "Cx3" at 166.7,135.407 h1.52
  text "100uF" at 235.991,134.849 h1.52
  text "104" at 236.334,134.429 h1.52
  text "X2" at 216.408,132.766 h1.52
  text "C1" at 199.657,132.677 h1.52
  text "ATmega328-PU" at 191.681,132.372 h1.52
  text "LM78xx" at 177.33,131.61 h1.52
  text "C14" at 243.256,131.267 h1.52
  text "100uF" at 167.284,130.023 h1.52
  text "104" at 167.627,129.603 h1.52
  text "LED" at 234.95,128.168 h1.52
  text "X2" at 147.701,127.94 h1.52
  text "C1" at 130.95,127.851 h1.52
  text "ATmega328-PU" at 122.974,127.546 h1.52
  text "C4" at 223.698,126.822 h1.52
  text "CN-ALU-DIP" at 235.979,126.784 h1.52
  text "C3" at 218.084,126.568 h1.52
  text "C14" at 174.549,126.441 h1.52
  text "SW2" at 209.842,126.428 h1.52
  text "R10" at 237.592,126.162 h1.52
  text "S2" at 242.138,124.308 h1.52
  text "104" at 245.021,124.244 h1.52
  text "Header3" at 199.657,123.838 h1.52
  text "LED" at 166.243,123.342 h1.52
  text "LED" at 233.261,122.872 h1.52
  text "16Mhz" at 219.621,122.009 h1.52
  text "C4" at 154.991,121.996 h1.52
  text "CN-ALU-DIP" at 167.272,121.958 h1.52
  text "C3" at 149.377,121.742 h1.52
  text "SW2" at 141.135,121.602 h1.52
  text "R10" at 168.885,121.336 h1.52
  text "1k" at 236.665,120.358 h1.52
  text "R1" at 200,120.193 h1.52
  text "S2" at 173.431,119.482 h1.52
  text "104" at 176.314,119.418 h1.52
  text "Header3" at 130.95,119.012 h1.52
  text "LED" at 164.554,118.046 h1.52
  text "22pF" at 223.685,118.021 h1.52
  text "22pF" at 218.097,117.767 h1.52
  text "16Mhz" at 150.914,117.183 h1.52
  text "1k" at 167.957,115.532 h1.52
  text "R1" at 131.293,115.367 h1.52
  text "22pF" at 154.978,113.195 h1.52
  text "22pF" at 149.39,112.941 h1.52
  text "M?" at 218.338,105.766 h1.52
  text "1000uF" at 245.643,105.004 h1.52
  text "Domino 2" at 244.361,103.137 h1.52
  text "M?" at 149.631,100.94 h1.52
  text "1000uF" at 176.936,100.178 h1.52
  text "Domino 2" at 175.654,98.311 h1.52
  text "C13" at 244.272,97.866 h1.52
  text "CN-ALU-DIP" at 246.774,97.32 h1.52
  text "NRF24L01" at 221.145,95.161 h1.52
  text "U2" at 199.923,93.548 h1.52
  text "C13" at 175.565,93.04 h1.52
  text "LM7805" at 248.158,92.786 h1.52
  text "CN-ALU-DIP" at 178.067,92.494 h1.52
  text "104" at 246.291,90.843 h1.52
  text "NRF24L01" at 152.438,90.335 h1.52
  text "U2" at 131.216,88.722 h1.52
  text "Cx3" at 236.042,88.036 h1.52
  text "LM7805" at 179.451,87.96 h1.52
  text "104" at 177.584,86.017 h1.52
  text "LM78xx" at 246.672,84.239 h1.52
  text "Cx3" at 167.335,83.21 h1.52
  text "100uF" at 236.626,82.652 h1.52
  text "104" at 236.969,82.233 h1.52
  text "X2" at 217.043,80.569 h1.52
  text "C1" at 200.292,80.48 h1.52
  text "ATmega328-PU" at 192.316,80.175 h1.52
  text "LM78xx" at 177.965,79.413 h1.52
  text "C14" at 243.891,79.07 h1.52
  text "100uF" at 167.919,77.826 h1.52
  text "104" at 168.262,77.406 h1.52
  text "LED" at 235.585,75.971 h1.52
  text "X2" at 148.336,75.743 h1.52
  text "C1" at 131.585,75.654 h1.52
  text "ATmega328-PU" at 123.609,75.349 h1.52
  text "C4" at 224.333,74.625 h1.52
  text "CN-ALU-DIP" at 236.614,74.587 h1.52
  text "C3" at 218.719,74.371 h1.52
  text "C14" at 175.184,74.244 h1.52
  text "SW2" at 210.477,74.231 h1.52
  text "R10" at 238.227,73.965 h1.52
  text "S2" at 242.773,72.111 h1.52
  text "104" at 245.656,72.047 h1.52
  text "Header3" at 200.292,71.641 h1.52
  text "LED" at 166.878,71.145 h1.52
  text "LED" at 233.896,70.675 h1.52
  text "C4" at 155.626,69.799 h1.52
  text "16Mhz" at 220.256,69.812 h1.52
  text "CN-ALU-DIP" at 167.907,69.761 h1.52
  text "C3" at 150.012,69.545 h1.52
  text "SW2" at 141.77,69.406 h1.52
  text "R10" at 169.52,69.139 h1.52
  text "1k" at 237.299,68.161 h1.52
  text "R1" at 200.635,67.996 h1.52
  text "S2" at 174.066,67.285 h1.52
  text "104" at 176.949,67.221 h1.52
  text "Header3" at 131.585,66.815 h1.52
  text "LED" at 165.189,65.849 h1.52
  text "22pF" at 224.32,65.824 h1.52
  text "22pF" at 218.732,65.57 h1.52
  text "16Mhz" at 151.549,64.986 h1.52
  text "1k" at 168.593,63.335 h1.52
  text "R1" at 131.928,63.17 h1.52
  text "22pF" at 155.613,60.998 h1.52
  text "22pF" at 150.025,60.744 h1.52
  text "M?" at 219.1,51.283 h1.52
  text "1000uF" at 246.405,50.521 h1.52
  text "Domino 2" at 245.123,48.654 h1.52
  text "M?" at 150.393,46.457 h1.52
  text "1000uF" at 177.698,45.695 h1.52
  text "Domino 2" at 176.416,43.828 h1.52
  text "C13" at 245.034,43.383 h1.52
  text "CN-ALU-DIP" at 247.536,42.837 h1.52
  text "NRF24L01" at 221.907,40.678 h1.52
  text "U2" at 200.685,39.065 h1.52
  text "C13" at 176.327,38.557 h1.52
  text "LM7805" at 248.92,38.303 h1.52
  text "CN-ALU-DIP" at 178.829,38.011 h1.52
  text "104" at 247.053,36.36 h1.52
  text "NRF24L01" at 153.2,35.852 h1.52
  text "U2" at 131.978,34.239 h1.52
  text "Cx3" at 236.804,33.553 h1.52
  text "LM7805" at 180.213,33.477 h1.52
  text "104" at 178.346,31.534 h1.52
  text "LM78xx" at 247.434,29.756 h1.52
  text "Cx3" at 168.097,28.727 h1.52
  text "100uF" at 237.388,28.169 h1.52
  text "104" at 237.731,27.749 h1.52
  text "X2" at 217.805,26.086 h1.52
  text "C1" at 201.054,25.997 h1.52
  text "ATmega328-PU" at 193.078,25.692 h1.52
  text "LM78xx" at 178.727,24.93 h1.52
  text "C14" at 244.653,24.587 h1.52
  text "100uF" at 168.681,23.343 h1.52
  text "104" at 169.024,22.924 h1.52
  text "LED" at 236.347,21.488 h1.52
  text "X2" at 149.098,21.26 h1.52
  text "C1" at 132.347,21.171 h1.52
  text "ATmega328-PU" at 124.371,20.866 h1.52
  text "C4" at 225.095,20.142 h1.52
  text "CN-ALU-DIP" at 237.376,20.104 h1.52
  text "C3" at 219.481,19.888 h1.52
  text "C14" at 175.946,19.761 h1.52
  text "SW2" at 211.239,19.748 h1.52
  text "R10" at 238.989,19.482 h1.52
  text "S2" at 243.535,17.628 h1.52
  text "104" at 246.418,17.564 h1.52
  text "Header3" at 201.054,17.158 h1.52
  text "LED" at 167.64,16.662 h1.52
  text "LED" at 234.658,16.192 h1.52
  text "16Mhz" at 221.018,15.329 h1.52
  text "C4" at 156.388,15.316 h1.52
  text "CN-ALU-DIP" at 168.669,15.278 h1.52
  text "C3" at 150.774,15.062 h1.52
  text "SW2" at 142.532,14.922 h1.52
  text "R10" at 170.282,14.656 h1.52
  text "1k" at 238.061,13.678 h1.52
  text "R1" at 201.397,13.513 h1.52
  text "S2" at 174.828,12.802 h1.52
  text "104" at 177.711,12.738 h1.52
  text "Header3" at 132.347,12.332 h1.52
  text "LED" at 165.951,11.367 h1.52
  text "22pF" at 225.082,11.341 h1.52
  text "22pF" at 219.494,11.087 h1.52
  text "16Mhz" at 152.311,10.503 h1.52
  text "1k" at 169.355,8.852 h1.52
  text "R1" at 132.69,8.687 h1.52
  text "22pF" at 156.375,6.515 h1.52
  text "22pF" at 150.787,6.261 h1.52